# Altium PCB PCB1.PcbDoc
Units mil, origin at the board's own origin, x right, y up, seen from the top; angles counter-clockwise.
Board outline 6000 x 4000 mil, 2 copper layers (Top Layer, Bottom Layer); 35 components, 34 nets, 106 pads, 12 vias.
Unrouted connection lines stored in the file: 2.
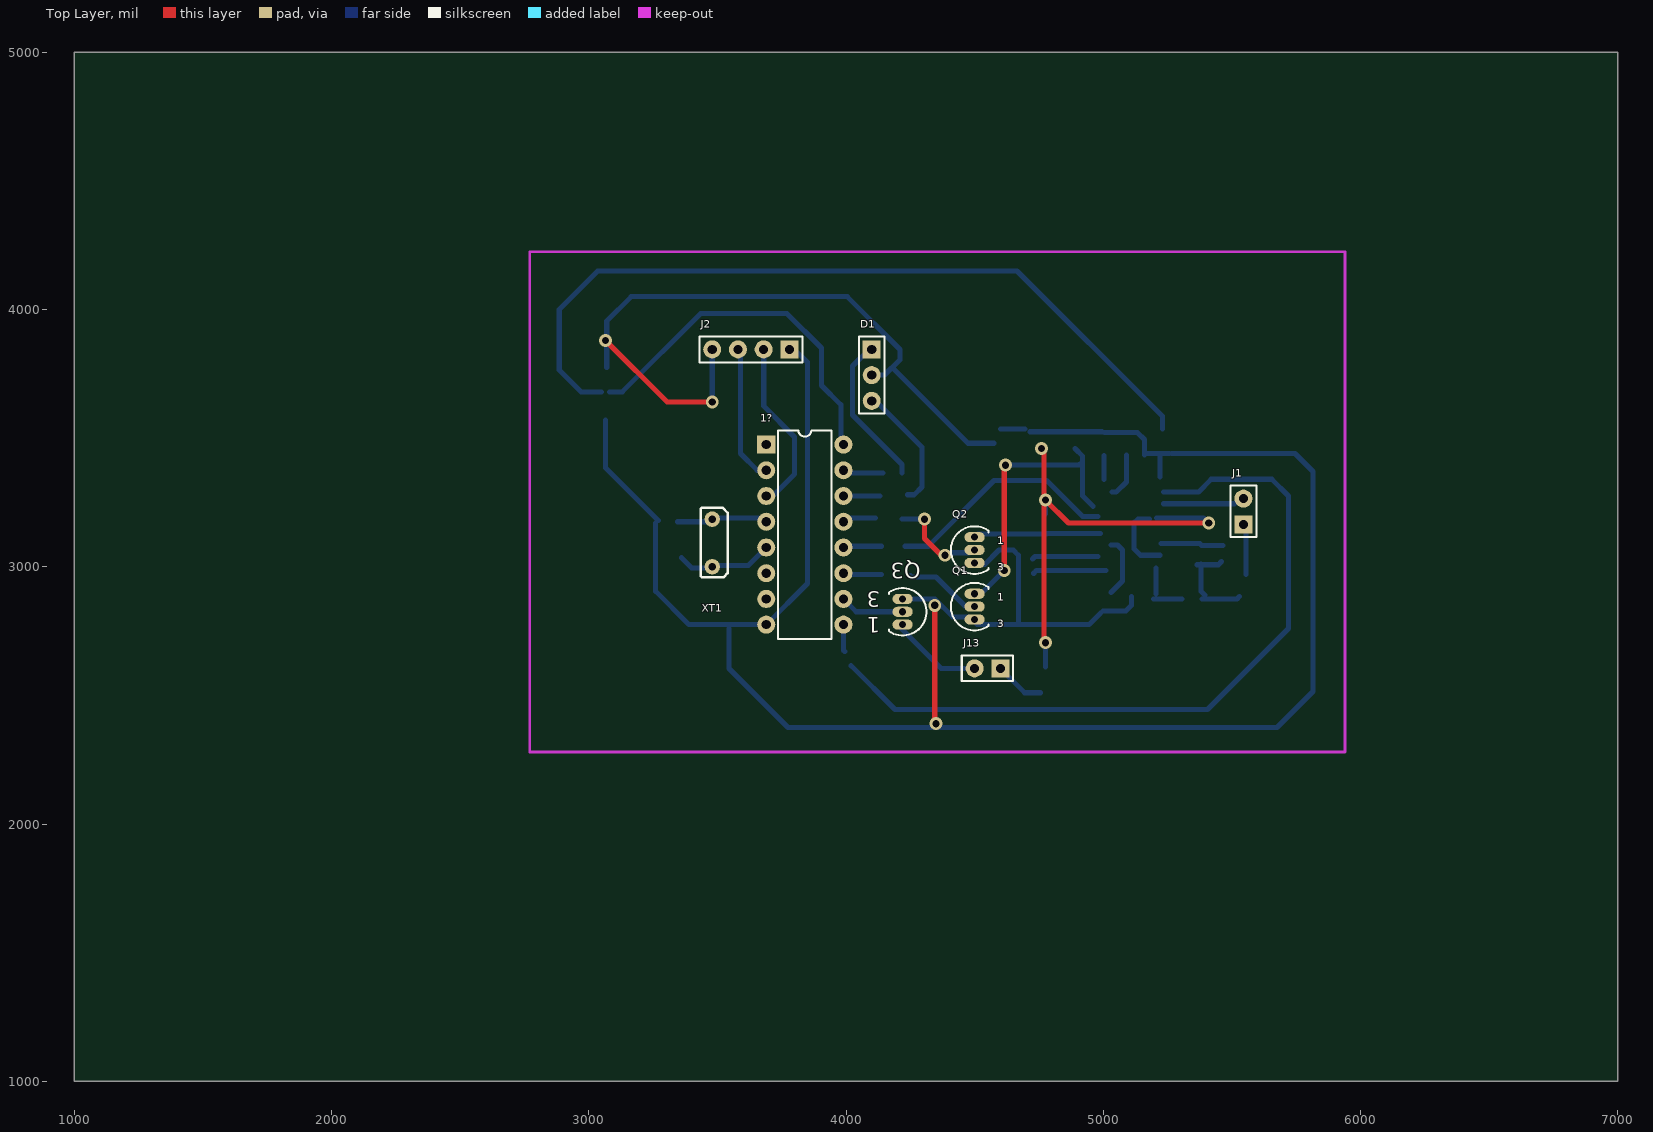
[diagram p0: Top Layer view]
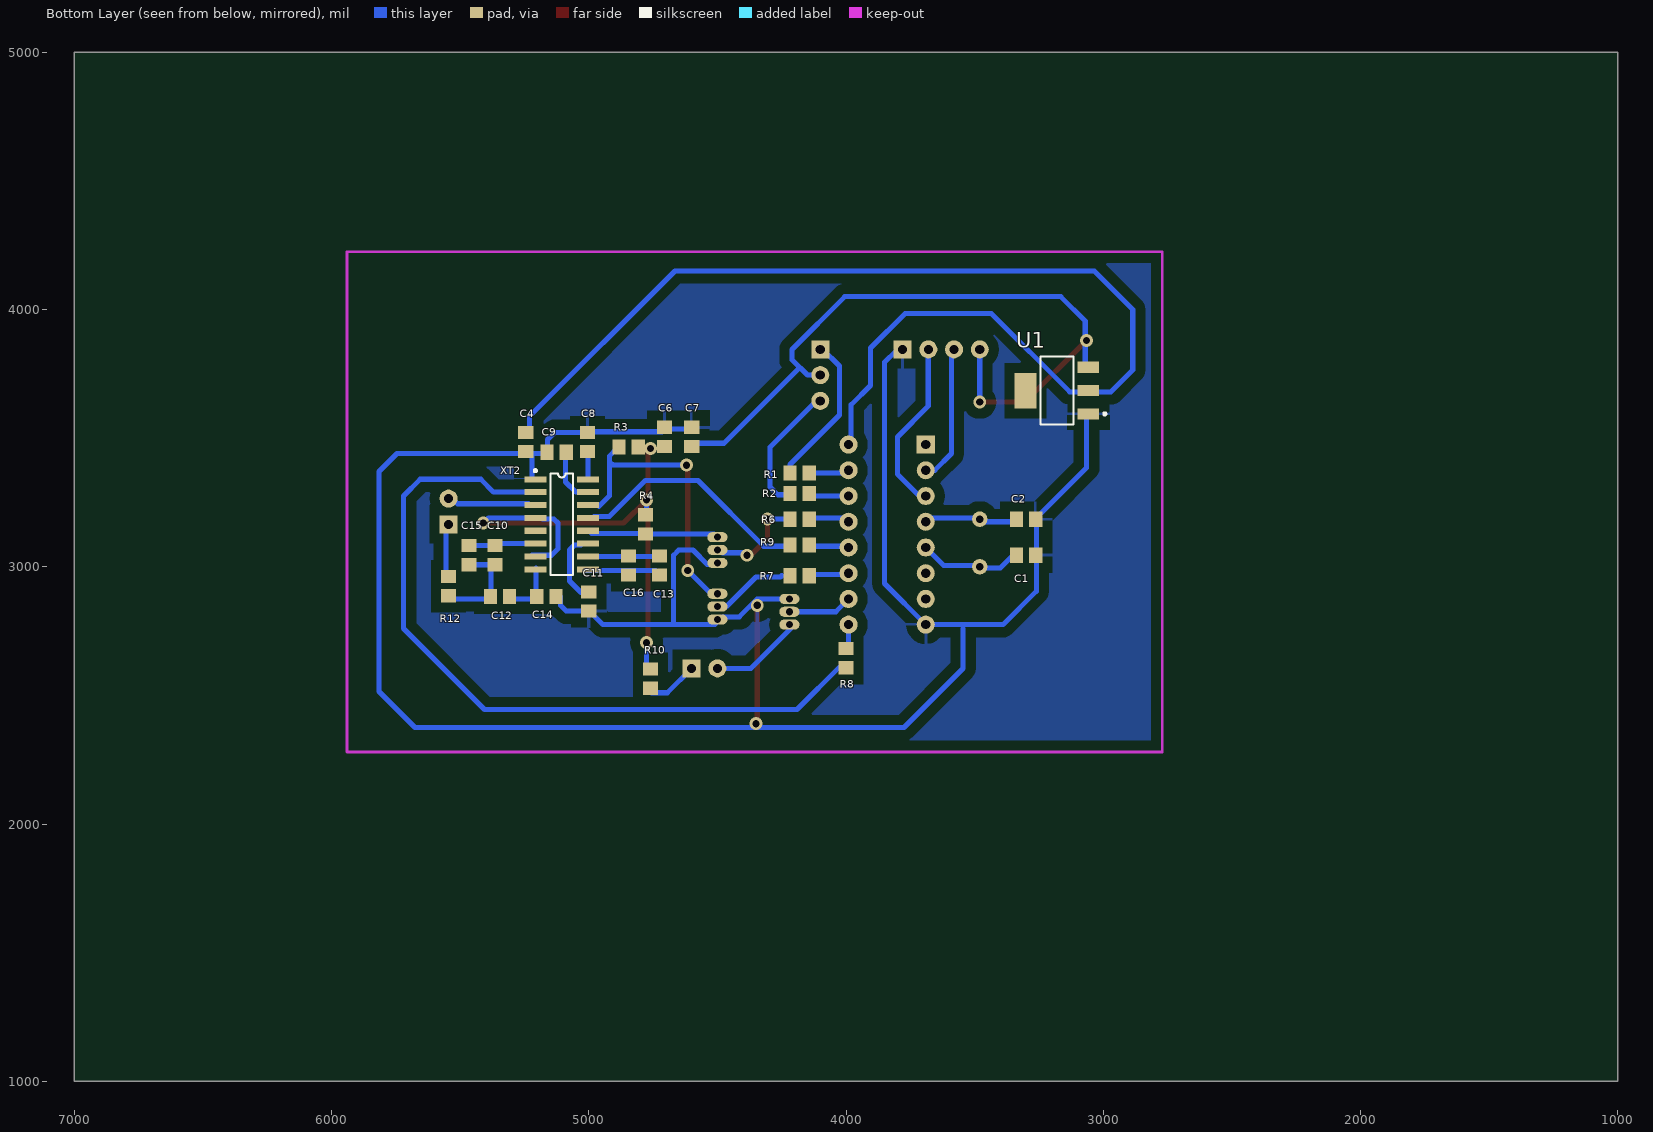
[diagram p1: Bottom Layer view, seen from below]

## Layer stack, top to bottom
Top Layer: signal copper 1.4
Dielectric: dielectric 12.6, FR-4, Dk 4.8
Bottom Layer: signal copper 1.4

## Board outline
1000,1000 7000,1000 7000,5000 1000,5000

## Design rules (kind name [scope] priority, off if disabled: settings)
Clearance [All] p1: gap=10
ComponentClearance [All] p1: gap=10 collisioncheckmode=3 verticalgap=10
PolygonConnect [All] p1: connectstyle=Relief reliefconductorwidth=10 reliefentries=4 polygonreliefangle="90 Angle"
RoutingVias [All] p1: holewidth=28 width=50 viastyle="Through Hole" minholewidth=28 minwidth=50 maxholewidth=28 maxwidth=50
SolderMaskExpansion [All] p1: expansion=4
TestPointUsage [All] p1: valid=0 allowmultiple=FALSE
Testpoint [All] p1: side=15 testpointundercomponent=TRUE minsize=40 maxsize=100 preferedsize=60 minholesize=0 maxholesize=40 preferedholesize=32 testpointgrid=1 style=1023 order=0123456789
Width [All] p1: maxlimit=50 minlimit=10 preferedwidth=10 minimp=50.000000 maximp=50.000000 favimp=50.000000
18 further rules are at their usual default settings.

## Components (designator, comment, footprint, x,y, rotation, side; value= is the part's Value field where it differs from the comment)
1? "RES1" DIP-16 3840,3125 r270 top
C1 "33P" 2012[0805] 3300,3045 r0 bottom
C2 "33P" 2012[0805] 3300,3185 r0 bottom
C4 "104" 2012[0805] 5245,3485 r270 bottom
C6 "104" 2012[0805] 4705,3505 r90 bottom
C7 "104" 2012[0805] 4600,3505 r90 bottom
C8 "104" 2012[0805] 5005,3485 r270 bottom
C9 "103" 2012[0805] 5125,3445 r180 bottom
C10 "3.3nF" 2012[0805] 5365,3045 r90 bottom
C11 "104" 2012[0805] 5000,2865 r270 bottom
C12 "27pF" 2012[0805] 5345,2885 r180 bottom
C13 "104" 2012[0805] 4725,3005 r90 bottom
C14 "103" 2012[0805] 5165,2885 r180 bottom
C15 "1nF" 2012[0805] 5465,3045 r90 bottom
C16 "104" 2012[0805] 4845,3005 r90 bottom
D1 "LED" HDR1X3 4100,3845 r270 top
J1 "CON2" HDR1X2 5545,3165 r90 top
J2 "DownLoad" HDR1X4 3780,3845 r180 top
J13 "CON2" HDR1X2 4600,2605 r180 top
Q1 "9014" TO-92 4500,2845 r0 top
Q2 "9014" TO-92 4500,3065 r0 top
Q3 "9014" TO-92 4220,2825 r180 top
R1 "2.2K" 2012[0805] 4180,3365 r0 bottom
R2 "2.2K" 2012[0805] 4180,3285 r0 bottom
R3 "10K" 2012[0805] 4845,3465 r0 bottom
R4 "10K" 2012[0805] 4780,3165 r270 bottom
R6 "5.1K" 2012[0805] 4180,3185 r0 bottom
R7 "5.1K" 2012[0805] 4180,2965 r0 bottom
R8 "1K" 2012[0805] 4000,2645 r270 bottom
R9 "1K" 2012[0805] 4180,3085 r180 bottom
R10 "10K" 2012[0805] 4760,2565 r270 bottom
R12 "10R" 2012[0805] 5545,2925 r270 bottom
U1 "AMS1117" SOT223 3180,3685 r90 bottom
XT1 "12MHZ" JZ 3480,3185 r270 top
XT2 "12MHZ" SOIC16 5105,3165 r270 bottom

## Footprints (in the part's own frame and the unit in brackets; to place one, negate y for a bottom-side part, rotate by r counter-clockwise, add the part's x,y. Pads: shape width x height; smd on the part's side, far side on the other; paste and mask are expansions set on the pad)
2012[0805] [mm] "Chip Resistor; Body 2.0 x 1.3 mm (LxW typ)"
  rect 1.3x1.5 smd: 1(-0.95,0) 2(0.95,0)
DIP-16 [mm] "DIP; 16 Leads; Row Spacing 7.62 mm; Pitch 2.54 mm"
  rect 1.779x1.779 hole 0.9: 1(-8.89,-3.81)
  round 1.779 hole 0.9: 2(-6.35,-3.81) 3(-3.81,-3.81) 4(-1.27,-3.81) 5(1.27,-3.81) 6(3.81,-3.81) 7(6.35,-3.81) 8(8.89,-3.81) 9(8.89,3.81) 10(6.35,3.81) 11(3.81,3.81) 12(1.27,3.81) 13(-1.27,3.81) 14(-3.81,3.81) 15(-6.35,3.81) 16(-8.89,3.81)
  silkscreen extent -10.3,-2.65 10.3,2.65
HDR1X2 [mm] "Connector; Header; 2 Position"
  rect 1.779x1.779 hole 0.9: 1(0,0)
  round 1.779 hole 0.9: 2(2.54,0)
  silkscreen extent -1.27,-1.27 3.81,1.27
HDR1X3 [mm] "Connector; Header; 3 Position"
  rect 1.779x1.779 hole 0.9: 1(0,0)
  round 1.779 hole 0.9: 2(2.54,0) 3(5.08,0)
  silkscreen extent -1.27,-1.27 6.35,1.27
HDR1X4 [mm] "Connector; Header; 4 Position"
  rect 1.779x1.779 hole 0.9: 1(0,0)
  round 1.779 hole 0.9: 2(2.54,0) 3(5.08,0) 4(7.62,0)
  silkscreen extent -1.27,-1.27 8.89,1.27
JZ [mil]
  round 60 hole 30: 1(0,0) 2(185,0)
  silkscreen extent -45,-45 225,60
SOIC16 [mm] "Small Outline; 16 Leads; Body Width 3.9 mm; Pitch 1.27 mm"
  rect 0.6x2.2 smd: 1(-4.445,-2.6) 2(-3.175,-2.6) 3(-1.905,-2.6) 4(-0.635,-2.6) 5(0.635,-2.6) 6(1.905,-2.6) 7(3.175,-2.6) 8(4.445,-2.6) 9(4.445,2.6) 10(3.175,2.6) 11(1.905,2.6) 12(0.635,2.6) 13(-0.635,2.6) 14(-1.905,2.6) 15(-3.175,2.6) 16(-4.445,2.6)
  silkscreen extent -5.42,-2.72 5,1.1
SOT223 [mm] "SOT-223/SC-73; 4 Leads; Body 6.7 x 7.3 mm, inc. leads (LxW max)"
  rect 1.1x2.15 smd: 1(-2.3,-3.1) 2(0,-3.1) 3(2.3,-3.1)
  rect 3.5x2.15 smd: 4(0,3.1)
  silkscreen extent -3.35,-4.85 3.35,1.63
TO-92 [mm] "TO, Flat Index; 3 In-Line, Axial Leads; Body Dia. 4.6mm; Leads 0.41 x 0.39 mm (max)"
  oval 2x1 hole 0.7: 1(0,1.27) 2(0,0) 3(0,-1.27)
  silkscreen extent -2.34,-2.34 1.35,2.34

## Part data
1?: library part COMPONENT_3
C1 C2 C4 C6 C7 C8 C9 C10 C11 C12 C13 C14 C15 C16: library part CAP, "Capacitor"
D1: library part CON3, "Connector"
J1 J13: "Connector"
J2: library part CON4, "Connector"
Q1 Q2 Q3: library part NPN, "NPN Transistor"
R1 R2 R3 R4 R6 R7 R8 R9 R10 R12: library part RES1
U1 XT2: library part COMPONENT_2
XT1: library part CRYSTAL, "Crystal"

## Via types
v1: diameter 50, hole 28, Top Layer to Bottom Layer, 12 vias

## Nets (pads, with @x,y where several pads share a name; then routed paths per layer and width w, separated by ;. In a path a pad name is that pad's centre, name@x,y a point inside that pad or via, vN(x,y) a via of type N, cw(c..) or ccw(c..) an arc to the next point about the centre after c; other vN are vias at no path point)
BUZZER: 1?.10 Q3.2 | length 250.7
  Bottom Layer w20: 1?.10 4040,2825 Q3.2
DEMOD_OUT: 1?.12 R9.2 | length 132.6
  Bottom Layer w20: 1?.12@4005,3080 R9.2@4137.6,3080
GND: 1?.8 C1.1 C2.1 C4.2 C6.2 C7.2 C8.1 C9.1 C11.2 C14.2 J2.1 Q1.3 Q2.3 Q3.3 U1.1 XT2.1 | length 9043.8
  Top Layer w20: v1@4345,2403.87 v1(4345,2850)
  Bottom Layer w20: 3065,3570 3065,3385 C2.1@3270,3180 ; C2.1@3260,3170 3260,2905 3390,2775 1?.8 3850,2935 3850,3795 J2.1@3805,3840 ; 3545,2760 3545,2605 3775,2375 5675,2375 5815,2515 5815,3370 5745,3440 C4.2@5265,3440 ; Q3.3 4345,2875 4414.69,2805.32 4479.69,2805.32 4510,2775 4945,2775 C11.2@4990,2820 ; Q2.3@4510,3010 4540,3010 4595,3065 4650,3065 4670,3045 4670,2775 ; C7.2@4600,3535 C6.2@4695,3535 ; C6.2@4715,3525 C8.1@4995,3525 ; C11.2 5087.6,2827.6 5110,2850 C14.2@5110,2885 ; C8.1 5132.6,3522.4 5160,3495 C9.1@5160,3435 ; C9.1@5175,3440 C4.2@5255,3440 ; XT2.1@5220,3350 C4.2@5220,3435
  other v1: 4350,2390
MOD: Q2.1 R4.2 XT2.12 | length 495.2
  Bottom Layer w20: Q2.1 4512.6,3127.6 R4.2 ; R4.2@4780,3130 XT2.12@4990,3130
MOD_D: Q2.2 R6.2 | length 349.1
  Top Layer w20: v1@4305,3175 4305,3110 v1@4375,3040
  Bottom Layer w20: R6.2 v1(4305,3185) ; v1@4389.69,3054.68 4479.69,3054.68 Q2.2@4485,3060
  other v1: 4385,3045
Net1?_11: 1?.11 R7.1 | length 127.6
  Bottom Layer w20: 1?.11@4010,2970 R7.1@4137.6,2970
Net1?_13: 1?.13 R6.1 | length 100
  Bottom Layer w20: 1?.13@4015,3190 4115,3190
Net1?_14: 1?.14 R2.1 | length 142.6
  Bottom Layer w20: 1?.14 R2.1@4132.6,3275
Net1?_15: 1?.15 R1.1 | length 147.6
  Bottom Layer w20: 1?.15@3995,3365 R1.1
NetC8_2: C8.2 XT2.16 | length 92.6
  Bottom Layer w20: XT2.16 C8.2@5002.64,3432.64
NetC9_2: C9.2 XT2.15 | length 176.6
  Bottom Layer w20: XT2.15@5035,3290 5050,3290 5090,3330 C9.2@5090,3435
NetC10_1: C10.1 C12.1 C15.1 R12.2 | length 375.5
  Bottom Layer w20: C10.1 5447.6,3007.6 C15.1@5460,3020 ; C10.1@5380,3010 5380,2905 C12.1@5395,2890 ; C12.1@5385,2875 5520,2875 R12.2@5530,2885
NetC10_2: C10.2 C15.2 XT2.6 | length 243.1
  Bottom Layer w20: XT2.6@5225,3090 5375,3090 5382.6,3082.4 C15.2
NetC11_1: C11.1 XT2.11 | length 236.9
  Bottom Layer w20: 5030,2900 5075,2945 5075,3065 5055,3085 XT2.11@5030,3085
NetC12_2: C12.2 C14.1 XT2.8 | length 210
  Bottom Layer w20: C14.1@5195,2875 C12.2@5305,2875 ; C14.1@5205,2895 XT2.8@5205,2995
NetC13_1: C13.1 C16.1 XT2.9 | length 284.1
  Bottom Layer w20: C13.1@4730,2975 4740,2985 XT2.9@5010,2985
NetC13_2: C13.2 C16.2 XT2.10 | length 259.1
  Bottom Layer w20: C13.2@4725,3030 4735,3040 XT2.10@4980,3040
NetD1_1: D1.1 R1.2 | length 586.6
  Bottom Layer w20: D1.1@4090,3845 4025,3780 4025,3590 4217.4,3397.6 R1.2
NetD1_3: D1.3 R2.2 | length 482
  Bottom Layer w20: D1.3@4110,3645 4115,3645 4295,3465 4295,3310 4265,3280 R2.2@4240,3280
NetJ1_1: J1.1 R12.1 | length 170
  Bottom Layer w20: R12.1@5555,2970 J1.1@5555,3140
NetJ1_2: J1.2 XT2.3 | length 296.2
  Bottom Layer w20: XT2.3@5235,3245 5510,3245 J1.2@5525,3260
NetJ13_1: J13.1 R10.2 | length 194.4
  Bottom Layer w20: J13.1 4695,2510 R10.2@4755,2510
NetJ13_2: J13.2 Q3.1 | length 356.3
  Bottom Layer w20: Q3.1@4210,2765 4370,2605 J13.2
NetR8_2: R8.2 XT2.2 | length 2948.5
  Bottom Layer w20: R8.2@4020,2615 4190,2445 5405,2445 5720,2760 5720,3275 5655,3340 5420,3340 5370,3290 XT2.2@5235,3290
NetR9_1: R9.1 XT2.13 | length 913.6
  Bottom Layer w20: R9.1@4230,3080 4320,3080 4575,3335 4780,3335 4920,3195 XT2.13@4980,3195
RDY/CLK: 1?.9 R8.1 | length 107.1
  Bottom Layer w20: 1?.9 3990,2675 R8.1@3995,2670
RXD: 1?.2 J2.3 | length 511.9
  Bottom Layer w20: J2.3@3590,3835 3590,3440 3655,3375 1?.2@3680,3375
SHD: Q1.1 R3.2 XT2.14 | length 1073.3
  Top Layer w20: v1(4615,2985) v1@4615,3380
  Bottom Layer w20: Q1.1@4520,2895 4525,2895 v1(4615,2985) ; v1(4620,3395) 4905,3395 4910,3400 ; R3.2@4890,3460 4920,3430 4920,3275 XT2.14@4960,3235
SHD_D: Q1.2 R7.2 | length 299.7
  Bottom Layer w20: 4250,2965 4255,2960 4350,2960 4465,2845 Q1.2
TXD: 1?.3 J2.2 | length 662
  Bottom Layer w20: J2.2 3680,3625 3800,3505 3800,3360 1?.3@3710,3270
VCC: C6.1 C7.1 D1.2 J2.4 R3.1 R4.1 R10.1 U1.3 XT2.4 XT2.7 | length 4940.8
  Top Layer w20: v1(3065,3880) 3305,3640 v1(3480,3640) ; v1@4770,2695 v1@4770,3460 ; v1(4775,3260) 4865,3170 v1(5410,3170)
  Bottom Layer w20: U1.3@3070,3775 3070,3955 3165,4050 4005,4050 4210,3845 4210,3805 4150,3745 D1.2 ; v1@3480,3635 J2.4 ; 4179.55,3774.55 4474.1,3480 C7.1@4575,3480 ; R10.1@4775,2610 v1@4775,2710 ; R4.1@4775,3205 v1(4775,3260) ; XT2.4@5180,3185 5135,3185 5120,3170 5120,3070 5145,3045 XT2.7@5220,3045 ; XT2.4 5390,3190 v1(5410,3170)
  other v1: 4775,2705 4760,3460
VDD: 1?.16 C4.1 U1.2 | length 4524.7
  Bottom Layer w20: U1.2@3050,3680 2970,3680 2885,3765 2885,4000 3035,4150 4665,4150 5230,3585 C4.1@5230,3535 ; U1.2@3080,3680 3130,3680 3435,3985 3770,3985 3905,3850 3905,3705 3980,3630 1?.16@3980,3490
XTAL1: 1?.5 C1.2 XT1.2 | length 360.6
  Bottom Layer w20: C1.2@3360,3035 3400,2995 XT1.2@3470,2995 ; XT1.2@3485,3005 3620,3005 1?.5
XTAL2: 1?.4 C2.2 XT1.1 | length 329.1
  Bottom Layer w20: C2.2@3345,3175 XT1.1@3490,3175 ; XT1.1@3500,3190 3670,3190 1?.4@3680,3180
pads on no net: 1?.1 1?.6 1?.7 U1.4 XT2.5

## Polygon pours and split planes (outlines as drawn)
GND on Bottom Layer "Bottom Layer-No Net" (solid, remove dead copper): 2790,2310 2800,2300 5875,2300 5875,2305 5930,2360 5905,2385 5905,4185 2820,4185 2810,4175 2790,4155 2790,2290

## Keep-outs
Keep-Out Layer:
  lines w10: 2770,2280 3010,2280 5940,2280 5940,4225 2770,4225 2770,2280

## Text inside footprints (layer, text, board x,y; h text height)
Q1: Top Overlay "3" at 4587.56,2764.88 h30; Top Overlay "1" at 4587.56,2867.05 h30
Q2: Top Overlay "3" at 4587.56,2984.88 h30; Top Overlay "1" at 4587.56,3087.05 h30
Q3: Top Overlay "3" at 4132.44,2905.12 h59.05 r180; Top Overlay "1" at 4132.44,2802.95 h59.05 r180